# Altium PCB PCB2.PcbDoc
Units mm, origin at the board's own origin, x right, y up, seen from the top; angles counter-clockwise.
Board outline 152.4 x 101.6 mm, 2 copper layers (Top Layer, Bottom Layer); 33 components, 50 nets, 189 pads, 3 vias.
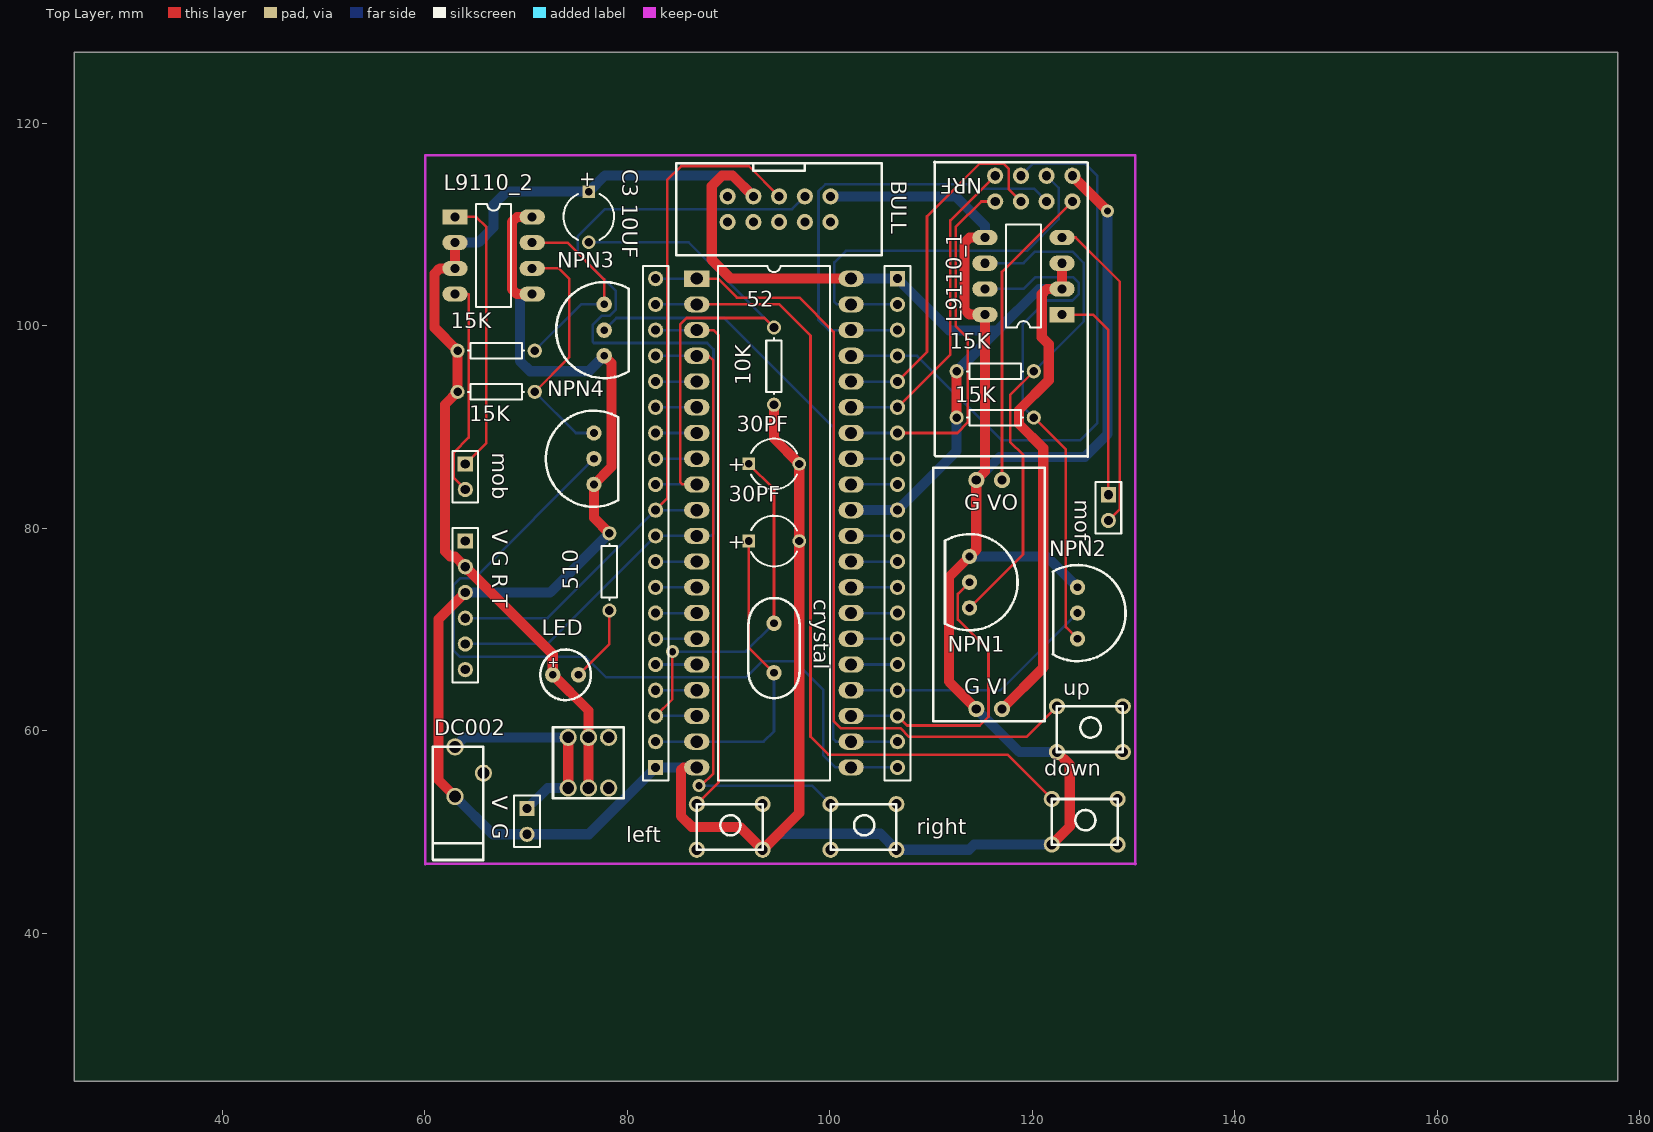
[diagram p0: Top Layer view]
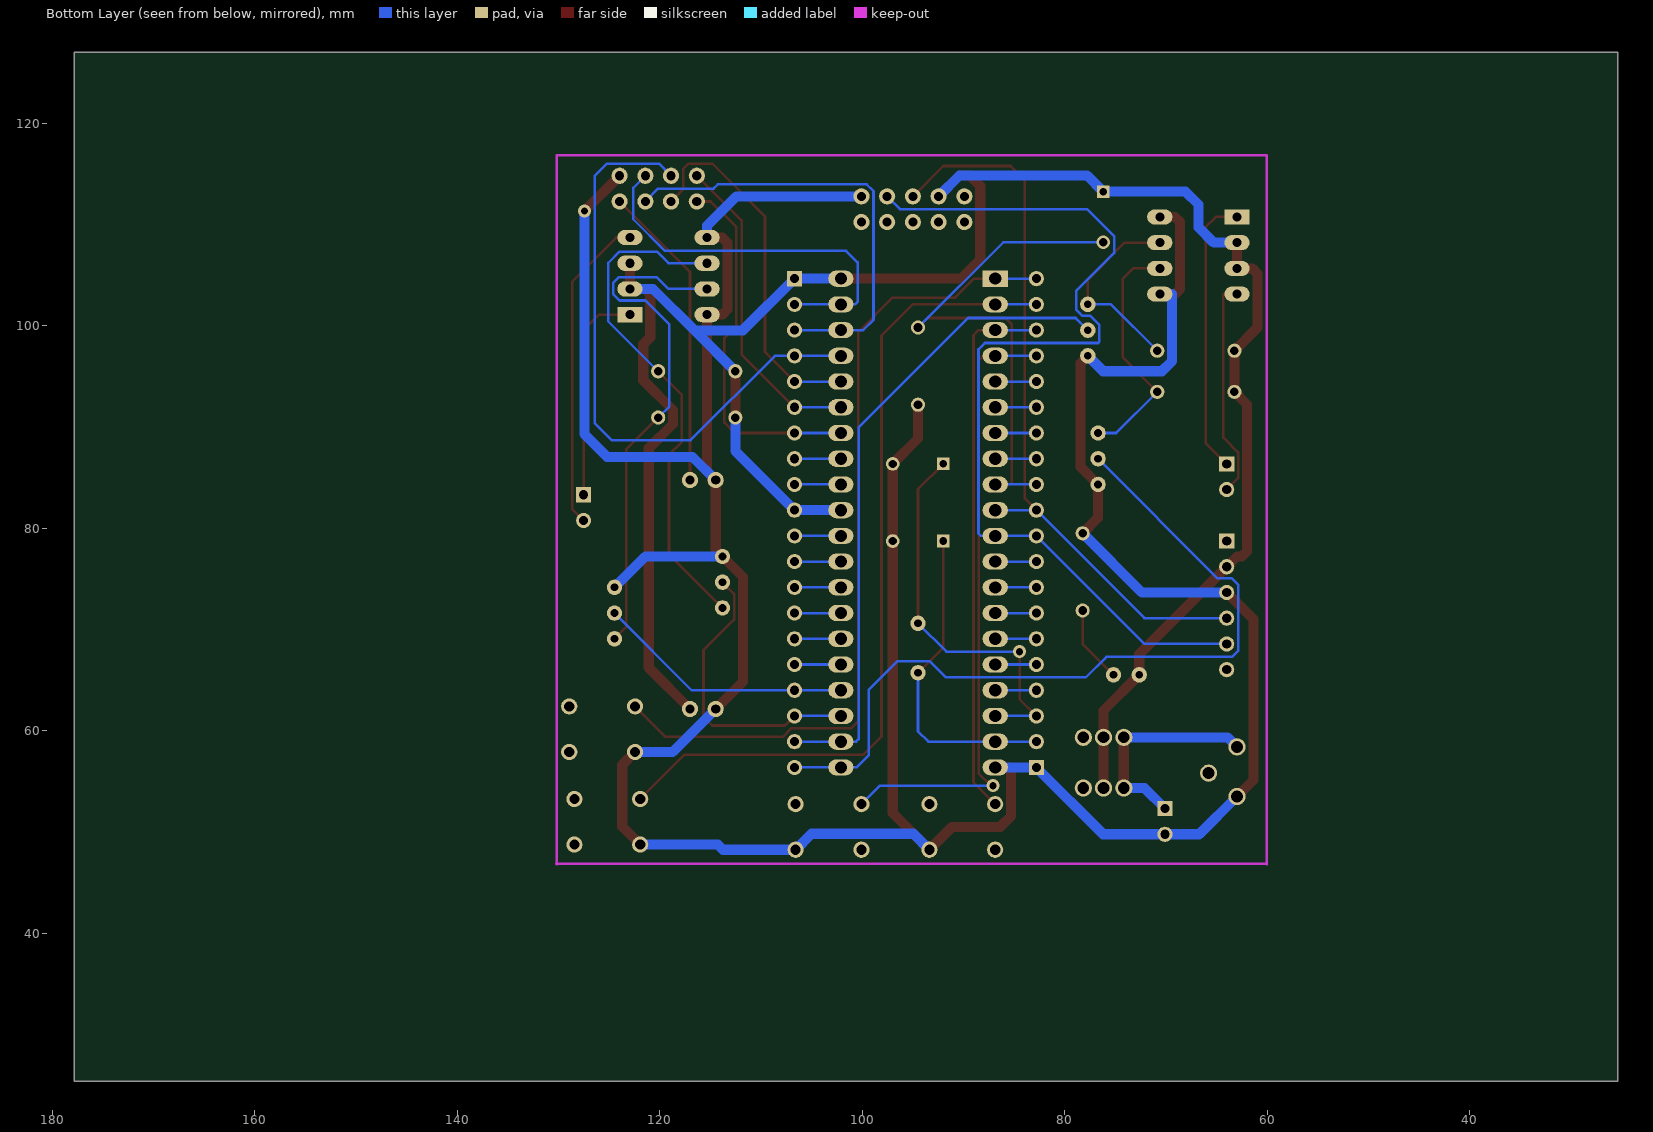
[diagram p1: Bottom Layer view, seen from below]

## Layer stack, top to bottom
Top Layer: signal copper 0.0356
Dielectric: dielectric 0.32, FR-4, Dk 4.8
Bottom Layer: signal copper 0.0356

## Board outline
25.4,25.4 177.8,25.4 177.8,127 25.4,127

## Design rules (kind name [scope] priority, off if disabled: settings)
Clearance [All] p1: gap=0.254
ComponentClearance [All] p1: gap=0.254 collisioncheckmode=0
PolygonConnect [All] p1: connectstyle=Relief reliefconductorwidth=0.254 reliefentries=4 polygonreliefangle="90 Angle"
RoutingVias [All] p1: holewidth=0.711 width=1.27 viastyle="Through Hole" minholewidth=0.711 minwidth=1.27 maxholewidth=0.711 maxwidth=1.27
SolderMaskExpansion [All] p1: expansion=0.102
TestPointUsage [All] p1: valid=0 allowmultiple=FALSE
Testpoint [All] p1: side=15 testpointundercomponent=TRUE minsize=1.016 maxsize=2.54 preferedsize=1.524 minholesize=0 maxholesize=1.016 preferedholesize=0.813 testpointgrid=0.025 style=1023 order=1234567890
Width POWER [InNet('POWER')] p1: maxlimit=1 minlimit=1 preferedwidth=1
Width GND [InNet('GND')] p2: maxlimit=1 minlimit=1 preferedwidth=1
Width VCC [InNet('VCC')] p3: maxlimit=1 minlimit=1 preferedwidth=1
Width [All] p4: maxlimit=0.254 minlimit=0.254 preferedwidth=0.254
17 further rules are at their usual default settings.

## Components (designator, comment, footprint, x,y, rotation, side; value= is the part's Value field where it differs from the comment)
10K "Comment" AXIAL-0.3 94.488,96.012 r90 top
15K "Comment" AXIAL-0.3 116.332,90.932 r0 top
15K "Comment" AXIAL-0.3 116.332,95.504 r0 top
15K "Comment" AXIAL-0.3 67.056,97.536 r0 top
15K "Comment" AXIAL-0.3 67.056,93.472 r0 top
30PF "Comment" CAPPR5-5x5 94.488,86.36 r0 top
30PF "Comment" CAPPR5-5x5 94.488,78.74 r0 top
52 "Comment" 89C52 86.868,104.648 r0 top
510 "Comment" AXIAL-0.3 78.232,75.692 r90 top
BULL "Comment" BULL 100.076,112.776 r180 top
"C3 10UF" "Comment" CAPPR5-5x5 76.2,110.744 r270 top
crystal "Comment" crystal 94.488,70.612 r270 top
DC002 "Comment" DC002 62.992,58.42 r90 top
down "Comment" Key 121.92,48.768 r0 top
L9110_1 "Comment" DIP8 122.936,101.092 r180 top
L9110_2 "Comment" DIP8 62.992,110.744 r0 top
LED "Comment" LED 72.644,65.532 r0 top
left "Comment" Key 86.868,48.26 r0 top
mob "Comment" HDR1X2 64.008,86.36 r270 top
mof "Comment" HDR1X2 127.508,83.312 r270 top
NPN1 "Comment" NPN 113.792,74.676 r180 top
NPN2 "Comment" NPN 124.46,71.628 r180 top
NPN3 "Comment" NPN 77.724,99.568 r0 top
NPN4 "Comment" NPN 76.708,86.868 r0 top
right "Comment" Key 100.076,48.26 r0 top
up "Comment" Key 122.428,57.912 r0 top
"V  G" "Comment" HDR1X2 70.104,52.324 r270 top
"V G R T" "Comment" HDR1X6 64.008,78.74 r270 top
? "Comment" nrf2401 123.952,114.808 r180 top
? "Comment" 3.3v 110.236,60.96 r0 top
? "Comment" HDR1X20 106.68,104.648 r270 top
? "Comment" HDR1X20 82.804,56.388 r90 top
? "Comment" SWITCH 74.168,54.356 r0 top

## Footprints (in the part's own frame and the unit in brackets; to place one, negate y for a bottom-side part, rotate by r counter-clockwise, add the part's x,y. Pads: shape width x height; smd on the part's side, far side on the other; paste and mask are expansions set on the pad)
3.3v [mm]
  round 1.6 hole 0.9: 0(4.23,1.2) 1(6.77,1.2) 2(4.23,23.8) 3(6.77,23.8)
  silkscreen extent 0,0 11,25
89C52 [mm]
  rect 2.5x1.6 hole 1.2: 1(0,0)
  oval 2.5x1.6 hole 1.2: 2(0,-2.54) 3(0,-5.08) 4(0,-7.62) 5(0,-10.16) 6(0,-12.7) 7(0,-15.24) 8(0,-17.78) 9(0,-20.32) 10(0,-22.86) 11(0,-25.4) 12(0,-27.94) 13(0,-30.48) 14(0,-33.02) 15(0,-35.56) 16(0,-38.1) 17(0,-40.64) 18(0,-43.18) 19(0,-45.72) 20(0,-48.26) 21(15.24,-48.26) 22(15.24,-45.72) 23(15.24,-43.18) 24(15.24,-40.64) 25(15.24,-38.1) 26(15.24,-35.56) 27(15.24,-33.02) 28(15.24,-30.48) 29(15.24,-27.94) 30(15.24,-25.4) 31(15.24,-22.86) 32(15.24,-20.32) 33(15.24,-17.78) 34(15.24,-15.24) 35(15.24,-12.7) 36(15.24,-10.16) 37(15.24,-7.62) 38(15.24,-5.08) 39(15.24,-2.54) 40(15.24,0)
  silkscreen extent 2.08,-49.53 13.16,1.27
AXIAL-0.3 [mm] "Resistor; 2 Leads"
  round 1.4 hole 0.85: 1(-3.81,0) 2(3.81,0)
  silkscreen extent -2.77,-0.76 2.77,0.76
BULL [mm]
  round 1.6 hole 0.9: 8(0,2.54) 9(2.54,2.54) 10(5.08,2.54) 11(7.62,2.54) 12(7.62,0) 13(5.08,0) 14(2.54,0) 15(0,0) 16(10.16,2.54) 17(10.16,0)
  silkscreen extent -5.07,-3.28 15.25,5.82
CAPPR5-5x5 [mm] "Capacitor, Electrolytic, Radial; Body 5 x 5 mm (Dia.xH typ); Pin Spacing 5 mm (typ)"
  rect 1.25x1.25 hole 0.75: 1(-2.5,0)
  round 1.35 hole 0.8: 2(2.5,0)
  silkscreen extent -2.26,-2.5 2.27,2.5
crystal [mil]
  round 60 hole 30: 24(0,0) 25(192.13,0)
  silkscreen extent -98,-100 290,100
DC002 [mm]
  round 1.7 hole 1.2: 2(0,0) 3(-4.9,0) 4(-2.6,-2.8)
  silkscreen extent -11.18,-2.8 0,2.2
DIP8 [mm]
  rect 2.5x1.5 hole 0.9: 1(0,0)
  oval 2.5x1.5 hole 0.9: 2(0,-2.54) 3(0,-5.08) 4(0,-7.62) 5(7.62,-7.62) 6(7.62,-5.08) 7(7.62,-2.54) 8(7.62,0)
  silkscreen extent 2.08,-8.89 5.54,1.27
HDR1X2 [mm] "Connector; Header; 2 Position"
  rect 1.5x1.5 hole 0.9: 1(0,0)
  round 1.5 hole 0.9: 2(2.54,0)
  silkscreen extent -1.27,-1.27 3.81,1.27
HDR1X6 [mm] "Connector; Header; 6 Position"
  rect 1.5x1.5 hole 0.9: 1(0,0)
  round 1.5 hole 0.9: 2(2.54,0) 3(5.08,0) 4(7.62,0) 5(10.16,0) 6(12.7,0)
  silkscreen extent -1.27,-1.27 13.97,1.27
HDR1X20 [mm] "Connector; Header; 20 Position"
  rect 1.5x1.5 hole 0.9: 1(0,0)
  round 1.5 hole 0.9: 2(2.54,0) 3(5.08,0) 4(7.62,0) 5(10.16,0) 6(12.7,0) 7(15.24,0) 8(17.78,0) 9(20.32,0) 10(22.86,0) 11(25.4,0) 12(27.94,0) 13(30.48,0) 14(33.02,0) 15(35.56,0) 16(38.1,0) 17(40.64,0) 18(43.18,0) 19(45.72,0) 20(48.26,0)
  silkscreen extent -1.27,-1.27 49.53,1.27
Key [mm]
  round 1.6 hole 1: 26(0,4.5) 27(6.5,4.5) 28(0,0) 29(6.5,0)
  silkscreen extent 0,0 6.5,4.5
LED [mil]
  round 60 hole 30: 0(0,0) 1(100,0)
  silkscreen extent -48,-98 148,98
NPN [mil]
  round 60 hole 30: 5(0,100) 6(0,0) 7(0,-100)
  silkscreen extent -187,-187 95,187
nrf2401 [mm]
  round 1.6 hole 0.9: 1(0,0) 2(0,2.54) 3(2.54,0) 4(2.54,2.54) 5(5.08,0) 6(5.08,2.54) 7(7.62,0) 8(7.62,2.54)
  silkscreen extent -1.52,-1.4 13.61,27.74
SWITCH [mm]
  round 1.7 hole 1.15: 18(0,0) 19(2,0) 20(4,0) 21(0,5) 22(2,5) 23(4,5)
  silkscreen extent -1.5,-1 5.5,6

## Via types
v1: diameter 1.27, hole 0.711, Top Layer to Bottom Layer, 3 vias

## Nets (pads, with @x,y where several pads share a name; then routed paths per layer and width w, separated by ;. In a path a pad name is that pad's centre, name@x,y a point inside that pad or via, vN(x,y) a via of type N, cw(c..) or ccw(c..) an arc to the next point about the centre after c; other vN are vias at no path point)
1: 52.1 ?.20@82.804,104.648 up.26 | length 82.1
  Top Layer w0.254: 52.1 88.951,104.648 90.83,102.768 97.003,102.768 100.381,99.39 100.381,60.96 101.067,60.274 106.959,60.274 107.823,59.411 119.427,59.411 up.26
  Bottom Layer w0.254: ?.20@82.804,104.648 52.1
2: 52.2 ?.19@82.804,102.108 down.26 | length 82.5
  Top Layer w0.254: 52.2 95.021,102.108 98.095,99.035 98.095,59.436 99.873,57.658 117.53,57.658 down.26
  Bottom Layer w0.254: ?.19@82.804,102.108 52.2
3: 52.3 ?.18@82.804,99.568 left.26 | length 53.6
  Top Layer w0.254: left.26 89.007,54.899 89.007,99.06 88.499,99.568 52.3
  Bottom Layer w0.254: ?.18@82.804,99.568 52.3
3.3v: ?.2@123.952,112.268 ?.3@117.006,84.76 | length 30.4
  Top Layer w0.254: ?.3@117.006,84.76 117.006,105.322 ?.2@123.952,112.268
4: 52.4 ?.17@82.804,97.028 right.26 | length 62.3
  Top Layer w0.254: 52.4 88.036,97.028 88.499,96.565 88.499,55.809 87.274,54.585 v1(87.097,54.585)
  Bottom Layer w0.254: ?.17@82.804,97.028 52.4 ; v1(87.097,54.585) 98.251,54.585 right.26
5: 52.5 ?.16@82.804,94.488 | length 4.1
  Bottom Layer w0.254: ?.16@82.804,94.488 52.5
6: 52.6 ?.15@82.804,91.948 | length 4.1
  Bottom Layer w0.254: ?.15@82.804,91.948 52.6
7: 52.7 ?.14@82.804,89.408 | length 4.1
  Bottom Layer w0.254: ?.14@82.804,89.408 52.7
8: 52.8 ?.13@82.804,86.868 | length 4.1
  Bottom Layer w0.254: ?.13@82.804,86.868 52.8
12: 52.12 ?.9@82.804,76.708 | length 4.1
  Bottom Layer w0.254: ?.9@82.804,76.708 52.12
13: 52.13 ?.8@82.804,74.168 | length 4.1
  Bottom Layer w0.254: ?.8@82.804,74.168 52.13
14: 52.14 ?.7@82.804,71.628 | length 4.1
  Bottom Layer w0.254: ?.7@82.804,71.628 52.14
15: 52.15 ?.6@82.804,69.088 | length 4.1
  Bottom Layer w0.254: ?.6@82.804,69.088 52.15
16: 52.16 ?.5@82.804,66.548 | length 4.1
  Bottom Layer w0.254: ?.5@82.804,66.548 52.16
17: 52.17 ?.4@82.804,64.008 | length 4.1
  Bottom Layer w0.254: ?.4@82.804,64.008 52.17
25: 52.25 ?.16@106.68,66.548 | length 4.6
  Bottom Layer w0.254: 52.25 ?.16@106.68,66.548
26: 52.26 ?.15@106.68,69.088 | length 4.6
  Bottom Layer w0.254: 52.26 ?.15@106.68,69.088
27: 52.27 ?.14@106.68,71.628 | length 4.6
  Bottom Layer w0.254: 52.27 ?.14@106.68,71.628
28: 52.28 ?.13@106.68,74.168 | length 4.6
  Bottom Layer w0.254: 52.28 ?.13@106.68,74.168
29: 52.29 ?.12@106.68,76.708 | length 4.6
  Bottom Layer w0.254: 52.29 ?.12@106.68,76.708
30: 52.30 ?.11@106.68,79.248 | length 4.6
  Bottom Layer w0.254: 52.30 ?.11@106.68,79.248
32: 52.32 ?.9@106.68,84.328 | length 4.6
  Bottom Layer w0.254: 52.32 ?.9@106.68,84.328
33: 52.33 ?.8@106.68,86.868 | length 4.6
  Bottom Layer w0.254: 52.33 ?.8@106.68,86.868
CE: 52.39 ?.2@106.68,102.108 ?.3@121.412,114.808 | length 38.9
  Bottom Layer w0.254: ?.2@106.68,102.108 52.39 100.711,102.108 100.457,102.362 100.457,106.248 101.6,107.391 119.482,107.391 122.606,110.515 122.606,113.614 ?.3@121.412,114.808
Con1A: 52.24 ?.17@106.68,64.008 NPN2.6 | length 25.5
  Bottom Layer w0.254: 52.24 106.68,64.008 116.84,64.008 NPN2.6
Con1B: 52.23 ?.18@106.68,61.468 NPN1.6 | length 29.3
  Top Layer w0.254: ?.18@106.68,61.468 107.62,60.528 114.808,60.528 115.672,61.392 115.672,67.97 112.649,70.993 112.649,73.533 NPN1.6
  Bottom Layer w0.254: 52.23 ?.18@106.68,61.468
Con2A: 52.22 ?.19@106.68,58.928 NPN3.6 | length 64.8
  Bottom Layer w0.254: NPN3.6 78.918,100.762 89.535,100.762 100.355,89.941 100.355,59.182 100.609,58.928 52.22 ?.19@106.68,58.928
Con2B: 52.21 ?.20@106.68,56.388 NPN4.6 | length 79.2
  Bottom Layer w0.254: NPN4.6 64.897,75.057 63.5,75.057 62.865,74.422 62.865,67.945 63.5,67.31 75.895,67.31 77.927,65.278 91.745,65.278 93.345,66.878 96.52,66.878 99.339,64.059 99.339,57.633 100.584,56.388 52.21 ?.20@106.68,56.388
CSN: 52.38 ?.3@106.68,99.568 ?.4@121.412,112.268 | length 44.4
  Bottom Layer w0.254: ?.3@106.68,99.568 52.38 99.898,99.568 98.882,100.584 98.882,113.284 99.568,113.97 114.249,113.97 114.681,113.538 120.142,113.538 ?.4@121.412,112.268
GND: 10K.1 30PF.2 52.20 510.2 "V  G.2" "V G R T.3" ?.0 ?.1@82.804,56.388 ?.1@123.952,114.808 ?.2@114.466,84.76 BULL.15 DC002.3 down.28 L9110_1.5 L9110_1.8 L9110_2.5 L9110_2.8 left.29 NPN1.7 NPN2.7 NPN3.7 NPN4.7 right.29 up.28 | length 350.4
  Top Layer w1: DC002.3 61.366,55.146 61.366,71.018 64.008,73.66 ; L9110_2.5 69.113,103.124 68.605,103.632 68.605,110.236 69.113,110.744 L9110_2.8 ; NPN3.7 78.435,96.317 78.435,86.055 NPN4.7 76.708,81.026 510.2 ; 52.20 85.547,56.388 85.293,56.134 85.293,51.587 86.36,50.521 91.107,50.521 left.29 96.988,51.88 96.988,78.74 96.988,86.36 94.488,88.86 10K.1 ; ?.0 111.768,64.858 111.768,75.192 NPN1.7 114.466,77.89 114.466,84.76 115.316,85.61 L9110_1.8 113.817,101.092 113.309,101.6 113.309,108.204 113.817,108.712 L9110_1.5 ; down.28 123.698,50.546 123.698,56.642 up.28 ; ?.1@123.952,114.808 v1(127.432,111.328)
  Bottom Layer w1: DC002.3 66.728,49.784 70.104,49.784 76.2,49.784 82.804,56.388 52.20 ; 64.008,73.66 72.39,73.66 510.2 ; L9110_2.5 69.393,103.124 69.393,96.52 70.409,95.504 76.2,95.504 NPN3.7 ; left.29 94.943,49.835 105.001,49.835 right.29 113.741,48.26 114.249,48.768 down.28 ; BULL.15 112.42,112.776 115.316,109.88 L9110_1.5 ; NPN1.7 121.412,77.216 NPN2.7 ; ?.0 118.714,57.912 up.28 ; ?.2@114.466,84.76 116.752,87.046 125.171,87.046 127.432,89.306 v1(127.432,111.328)
IA: 15K.2@120.142,90.932 L9110_1.7 NPN2.5 | length 51.1
  Top Layer w0.254: 15K.2@120.142,90.932 123.317,87.757 123.317,70.231 NPN2.5
  Bottom Layer w0.254: L9110_1.7 119.126,103.632 120.269,104.775 124.054,104.775 124.567,104.262 124.567,103.104 123.952,102.489 121.412,102.489 119.05,100.127 119.05,92.024 15K.2@120.142,90.932
IB: 15K.2@120.142,95.504 L9110_1.6 NPN1.5 | length 50.5
  Top Layer w0.254: NPN1.5 119.075,77.419 119.075,87.268 117.807,88.537 117.807,93.169 15K.2@120.142,95.504
  Bottom Layer w0.254: L9110_1.6 119.126,106.172 120.269,107.315 123.952,107.315 125.075,106.192 125.075,100.437 15K.2@120.142,95.504
IC: 15K.2@70.866,97.536 L9110_2.7 NPN3.5 | length 19.8
  Top Layer w0.254: L9110_2.7 74.092,108.204 77.724,104.572 NPN3.5
  Bottom Layer w0.254: 15K.2@70.866,97.536 75.438,102.108 NPN3.5
ID: 15K.2@70.866,93.472 L9110_2.6 NPN4.5 | length 24.2
  Top Layer w0.254: L9110_2.6 73.254,105.664 74.27,104.648 74.27,96.876 15K.2@70.866,93.472
  Bottom Layer w0.254: 15K.2@70.866,93.472 74.93,89.408 NPN4.5
IRQ: 52.34 ?.7@106.68,89.408 ?.8@116.332,112.268 | length 36.7
  Top Layer w0.254: ?.7@106.68,89.408 112.587,89.408 113.603,90.424 113.603,98.792 112.42,99.974 112.42,109.728 114.96,112.268 ?.8@116.332,112.268
  Bottom Layer w0.254: 52.34 ?.7@106.68,89.408
L1: 30PF.1@91.988,86.36 52.18 ?.3@82.804,61.468 crystal.24 | length 39.1
  Top Layer w0.254: ?.3@82.804,61.468 84.455,63.119 v1(84.455,67.818) ; 30PF.1@91.988,86.36 94.488,83.86 crystal.24
  Bottom Layer w0.254: ?.3@82.804,61.468 52.18 ; v1(84.455,67.818) 91.694,67.818 crystal.24
L2: 30PF.1@91.988,78.74 52.19 ?.2@82.804,58.928 crystal.25 | length 31.9
  Top Layer w0.254: 30PF.1@91.988,78.74 91.988,68.232 crystal.25
  Bottom Layer w0.254: ?.2@82.804,58.928 52.19 93.472,58.928 94.488,59.944 crystal.25
L3: 10K.2 52.9 "C3 10UF.2" ?.12@82.804,84.328 | length 53.1
  Top Layer w0.254: 52.9 85.471,84.328 85.217,84.582 85.217,100.127 85.852,100.762 93.548,100.762 10K.2
  Bottom Layer w0.254: 76.2,108.244 86.066,108.244 10K.2 ; ?.12@82.804,84.328 52.9
L4: 510.1 LED.1 | length 7.6
  Top Layer w0.254: LED.1 78.232,68.58 510.1
MISO: 52.35 ?.6@106.68,91.948 ?.7@116.332,114.808 | length 31.4
  Top Layer w0.254: ?.6@106.68,91.948 111.912,97.18 111.912,110.388 ?.7@116.332,114.808
  Bottom Layer w0.254: 52.35 ?.6@106.68,91.948
MOSI: 52.36 ?.5@106.68,94.488 ?.6@118.872,112.268 | length 36.2
  Top Layer w0.254: ?.5@106.68,94.488 109.601,97.409 109.601,110.795 114.808,116.002 117.145,116.002 117.678,115.468 117.678,113.462 ?.6@118.872,112.268
  Bottom Layer w0.254: 52.36 ?.5@106.68,94.488
OA: L9110_1.1 mof.1 | length 21.5
  Top Layer w0.254: L9110_1.1 125.984,101.092 127.508,99.568 mof.1
OB: L9110_1.4 mof.2 | length 31.6
  Top Layer w0.254: L9110_1.4 124.282,108.712 128.651,104.343 128.651,81.915 mof.2
OC: L9110_2.1 mob.1 | length 27.8
  Top Layer w0.254: L9110_2.1 65.075,110.744 66.091,109.728 66.091,88.443 mob.1
OD: L9110_2.4 mob.2 | length 21.7
  Top Layer w0.254: L9110_2.4 64.338,103.124 64.338,88.964 62.877,87.503 62.877,84.951 mob.2
POWER: "V  G.1" ?.18@74.168,54.356 ?.21 DC002.2 | length 21.5
  Top Layer w1: ?.18@74.168,54.356 ?.21
  Bottom Layer w1: DC002.2 63.928,59.356 ?.21 ; 70.104,52.324 72.136,54.356 ?.18@74.168,54.356
RXD: 52.10 "V G R T.4" ?.11@82.804,81.788 BULL.13 | length 73.2
  Top Layer w0.254: ?.11@82.804,81.788 83.947,82.931 83.947,114.376 85.344,115.773 91.999,115.773 BULL.13
  Bottom Layer w0.254: 64.008,71.12 72.136,71.12 82.804,81.788 52.10
SCK: 52.37 ?.4@106.68,97.028 ?.5@118.872,114.808 | length 61.4
  Bottom Layer w0.254: 52.37 106.68,97.028 108.61,97.028 116.942,88.697 124.739,88.697 126.416,90.373 126.416,114.808 125.222,116.002 120.066,116.002 ?.5@118.872,114.808
TXD: 52.11 "V G R T.5" ?.10@82.804,79.248 BULL.14 | length 96.8
  Bottom Layer w0.254: 64.008,68.58 72.136,68.58 82.804,79.248 52.11 88.265,79.248 88.519,79.502 88.519,97.663 87.884,98.298 76.708,98.298 76.581,98.425 76.581,100.076 77.47,100.965 78.232,100.965 78.867,101.6 78.867,103.429 75.133,107.163 75.133,108.839 77.8,111.506 96.266,111.506 BULL.14
VCC: 15K.1 52.31 52.40 "C3 10UF.1" "V G R T.2" ?.1@106.68,104.648 ?.1@117.006,62.16 ?.10@106.68,81.788 ?.19@76.168,54.356 ?.22 BULL.12 L9110_1.2 L9110_1.3 L9110_2.2 L9110_2.3 LED.0 | length 225.7
  Top Layer w1: L9110_2.2 L9110_2.3 61.493,105.664 60.985,105.156 60.985,99.797 63.246,97.536 63.246,93.472 61.996,92.222 61.996,77.729 62.509,77.216 62.992,77.216 64.008,76.2 72.644,67.564 LED.0 76.168,62.008 ?.22 ?.19@76.168,54.356 ; BULL.12 90.399,114.833 89.383,114.833 88.341,113.792 88.341,106.528 90.221,104.648 52.40 ; 15K.1@112.522,90.932 15K.1@112.522,95.504 ; ?.1@117.006,62.16 121.082,66.236 121.082,87.909 118.688,90.303 118.688,91.688 121.615,94.615 121.615,98.171 120.929,98.857 120.929,103.124 121.437,103.632 L9110_1.2 L9110_1.3
  Bottom Layer w1: L9110_2.2 65.278,108.204 66.802,109.728 66.802,111.974 68.072,113.244 76.2,113.244 77.789,114.833 90.399,114.833 BULL.12 ; 52.31 106.68,81.788 112.522,87.63 15K.1@112.522,90.932 ; 52.40 106.68,104.648 111.785,99.543 116.561,99.543 ; 15K.1@112.522,95.504 116.561,99.543 ; L9110_1.2 120.65,103.632 116.561,99.543
pads on no net: "V G R T.1" "V G R T.6" ?.20@78.168,54.356 ?.23 BULL.8 BULL.9 BULL.10 BULL.11 BULL.16 BULL.17 DC002.4 down.27 down.29 left.27 left.28 right.27 right.28 up.27 up.29

## Keep-outs
Keep-Out Layer:
  lines w0.254: 60.071,46.84 60.071,116.84 ; 60.175,116.84 130.175,116.84 ; 60.198,46.863 130.198,46.863 ; 130.175,46.83 130.175,116.83

## Text inside footprints (layer, text, board x,y; h text height)
30PF: Top Overlay "+" at 89.938,85.61 h1.5
30PF: Top Overlay "+" at 89.938,77.99 h1.5
"C3 10UF": Top Overlay "+" at 75.45,115.294 h1.5 r270
LED: Top Overlay "+" at 72.136,66.294 h1
?: Top Overlay "NRF" at 115.062,114.554 h1.52 r180
?: Top Overlay "G VO" at 113.284,81.788 h1.52; Top Overlay "G VI" at 113.284,63.627 h1.52